# Altium PCB PowerSupply.PcbDoc
Units mm, origin at the board's own origin, x right, y up, seen from the top; angles counter-clockwise.
Board outline 53.68 x 35 mm, 2 copper layers (Top Layer, Bottom Layer), stack 1.581 mm thick; 27 components, 16 nets, 71 pads, 0 vias.
Unrouted connection lines stored in the file: 51.
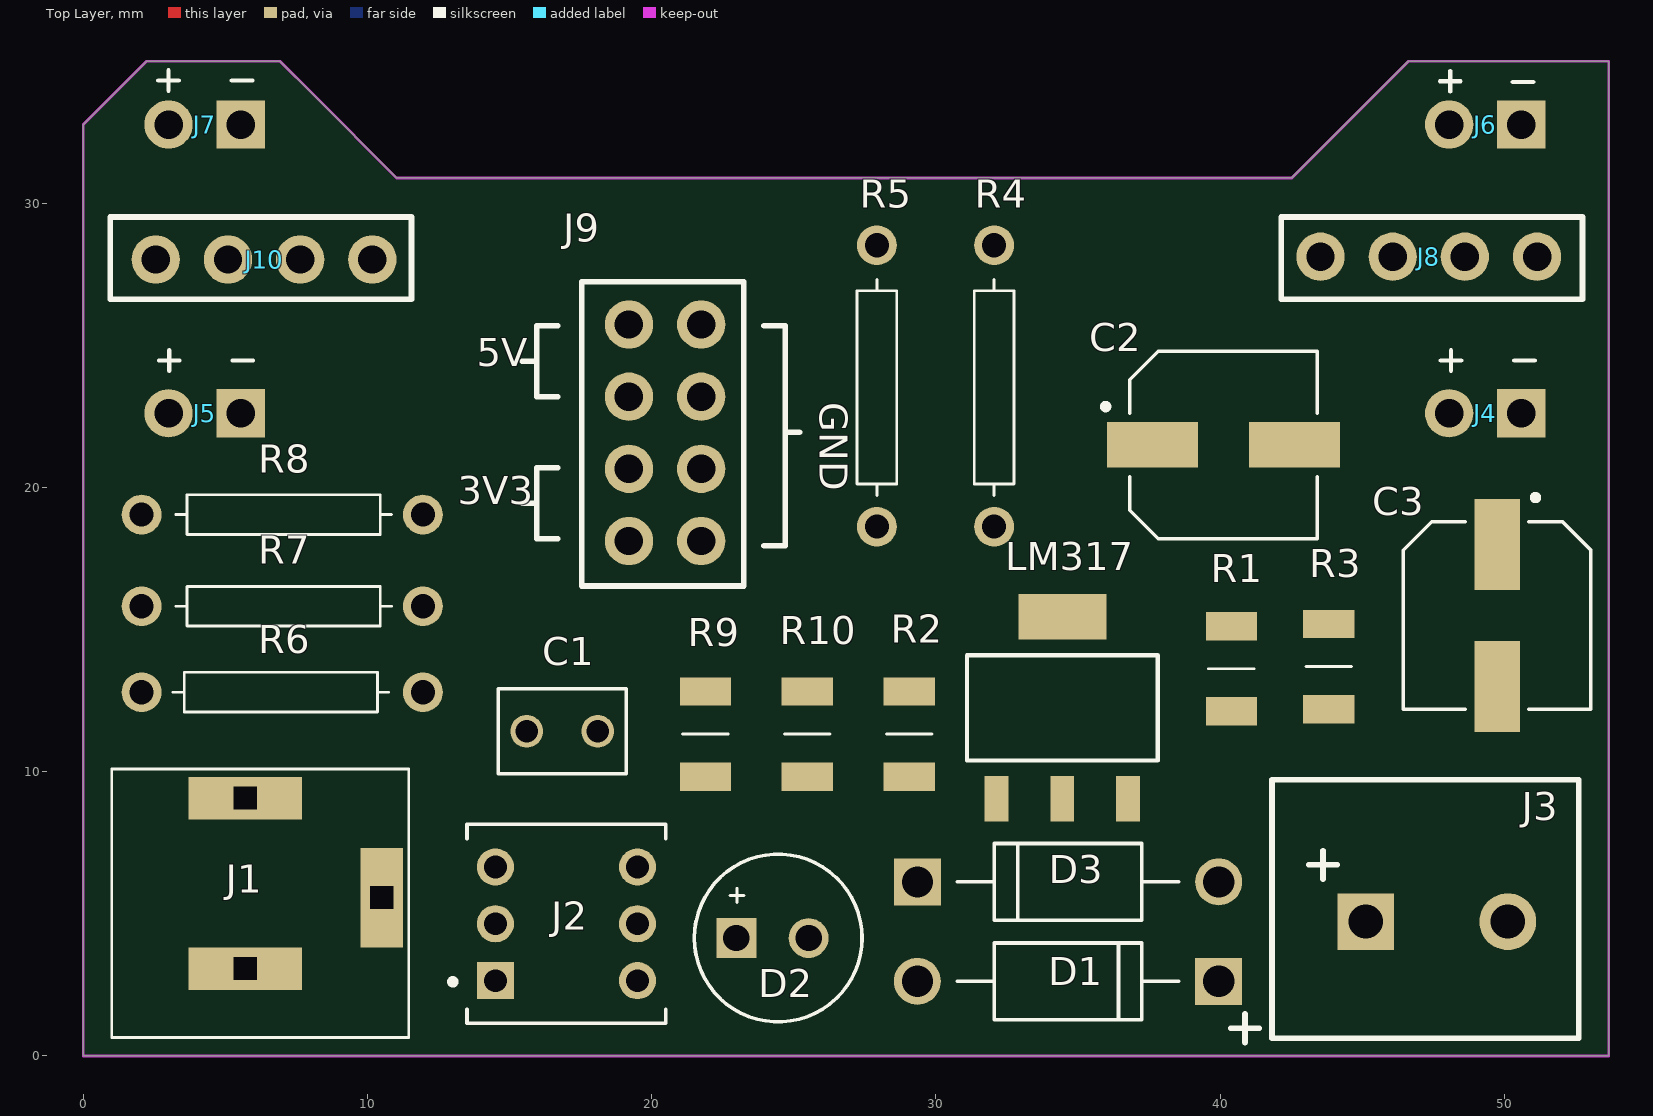
[diagram p0: Top Layer view]
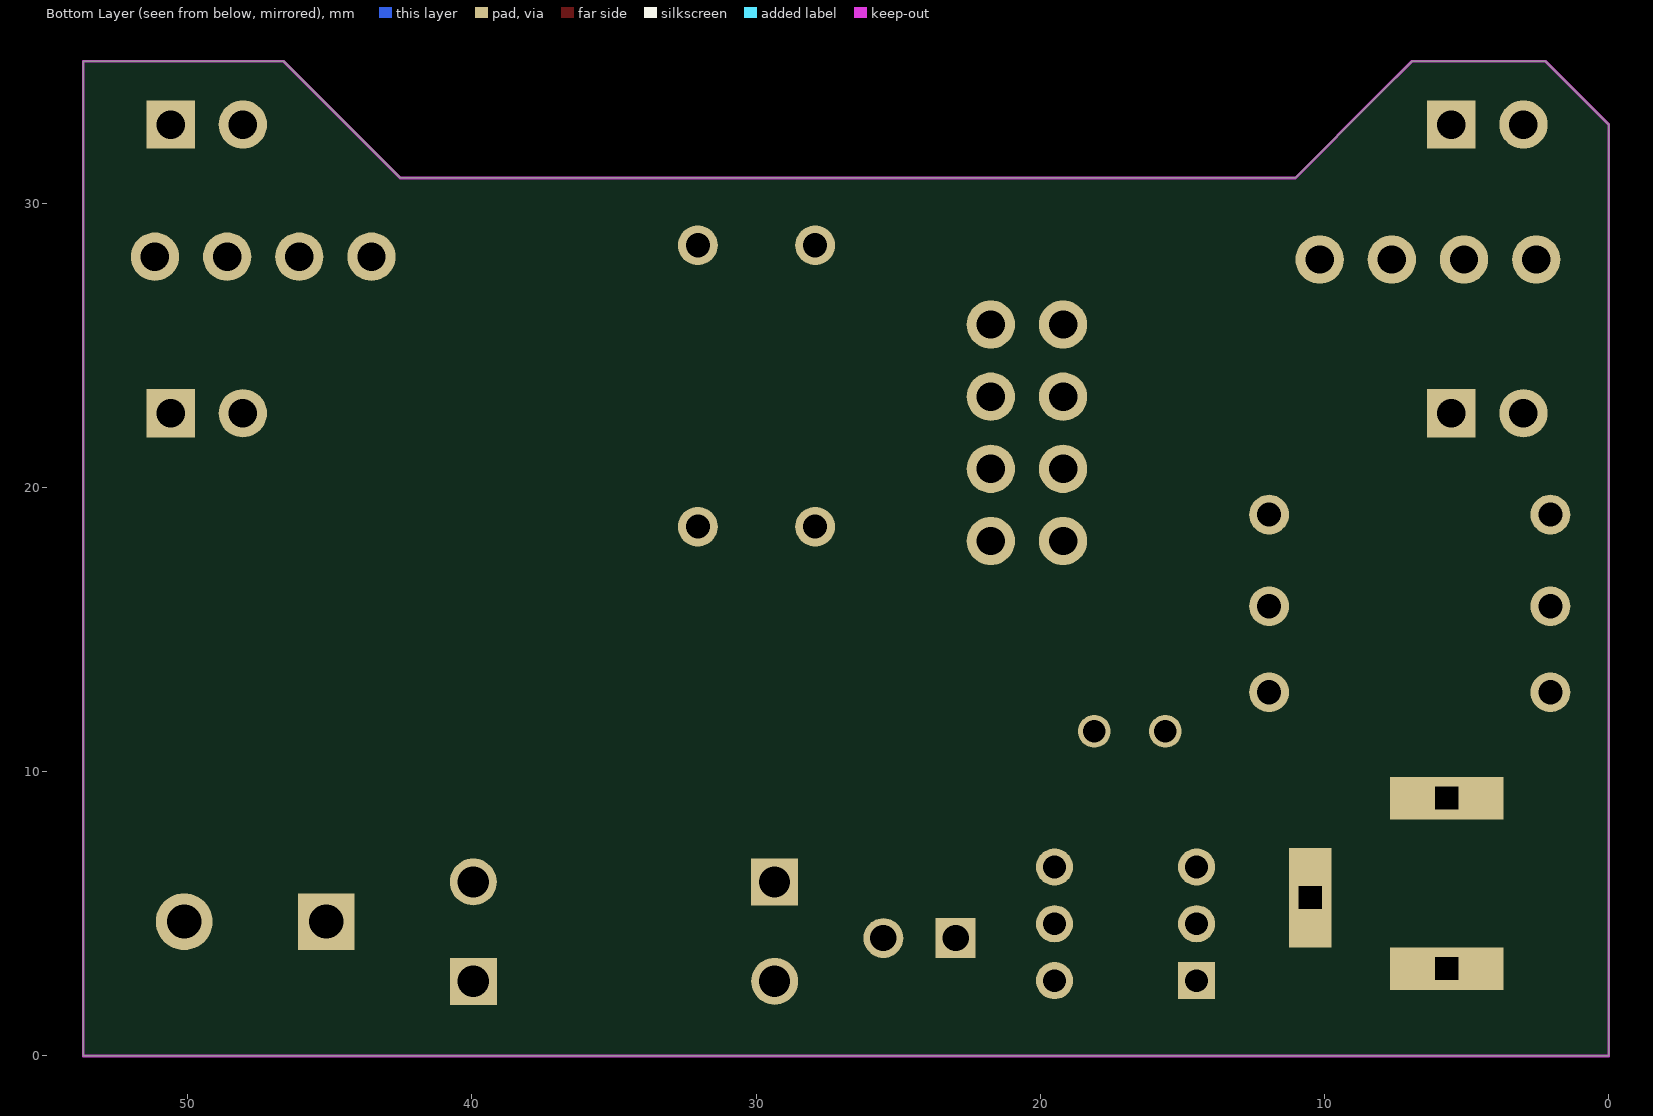
[diagram p1: Bottom Layer view, seen from below]

## Layer stack, top to bottom
Top Solder: solder mask 0.0102, Solder Resist, Dk 3.5
Top Layer: signal copper 0.0356
Dielectric 1: dielectric 1.51, FR-4, Dk 4.8
Bottom Layer: signal copper 0.0356
Bottom Solder: solder mask 0.0102, Solder Resist, Dk 3.5

## Board outline
0,14.775 0,32.775 2.225,35 6.925,35 11.025,30.9 42.525,30.9 46.625,35 53.675,35 53.675,0 37.731,0 0,0

## Design rules (kind name [scope] priority, off if disabled: settings)
AcuteAngle [All] p1: minimum=6.00000000000000E+0001 checktracksonly=TRUE
AssemblyTestPointUsage [(not InNetClass('NOTESTPOINTS'))] p1: allowmultiple=TRUE
AssemblyTestPointUsage AssemblyTestPointUsageN [InNetClass('NOTESTPOINTS')] p2: valid=2 allowmultiple=TRUE
AssemblyTestpoint [All] p1: testpointundercomponent=TRUE minsize=0.8 maxsize=2 preferedsize=1 minholesize=0 maxholesize=0.35 preferedholesize=0 testpointgrid=1.27 usegrid=FALSE gridoriginx=87.5 gridoriginy=62.5 gridtolerance=0 allowsidetop=TRUE minspacing=2.54 // Zollner
BoardOutlineClearance BoardCopperOutlineClearance [(OnLayer('Top Layer') OR OnLayer('Bottom Layer') )] p1: gap=0.5 ignorepadtopadclearanceinfootprint=FALSE except(1: Poly-OutlineEdge Region-OutlineEdge; 1.5: SMDPad-OutlineEdge THPad-OutlineEdge)
Clearance PadToViaClearance [IsVia and not IsComponentVia vs IsPad] p1: gap=0.025 ignorepadtopadclearanceinfootprint=TRUE
Clearance "Clearance (FAB)" [All] p2: gap=0.152 ignorepadtopadclearanceinfootprint=TRUE
ComponentClearance ComponentClearance_NetTie [((ObjectKind = 'Component') And (ComponentType = 'Net Tie')) Or (Footprint = 'StarPoint') Or (Footprint like 'NetTieVia*')] p1: gap=-3.81 collisioncheckmode=3 verticalgap=-3.81 showdistances=FALSE
ComponentClearance [All] p2: gap=0.254 collisioncheckmode=3 verticalgap=0.254 showdistances=FALSE
DiffPairsRouting [All] p1: maxlimit=1.27 minlimit=0.203 mostfreqgap=0.203 toplayer_minwidth=0.152 toplayer_maxwidth=2.54 toplayer_prefwidth=0.254 bottomlayer_minwidth=0.152 bottomlayer_maxwidth=2.54 bottomlayer_prefwidth=0.254 maxuncoupledlength=12.7
FabricationTestPointUsage [All] p1: valid=2 allowmultiple=FALSE
FabricationTestpoint [All] p1: side=3 testpointundercomponent=TRUE minsize=1.016 maxsize=2.54 preferedsize=1.524 minholesize=0 maxholesize=1.016 preferedholesize=0.813 testpointgrid=0.025 allowsidetop=TRUE allowsidebottom=TRUE usegrid=FALSE gridtolerance=0
HoleSize [All] p1: absolutevalues=TRUE maxlimit=6.35 minlimit=0.3 maxpercent=80.000 minpercent=20.000 // Zollner
HoleToHoleClearance HoleToHoleClearance_NetTieVia [InPadClass('NetTieVias') vs InPadClass('NetTieVias')] p1: gap=0 allowstackedmicrovias=TRUE
HoleToHoleClearance [All] p2: gap=0.25 allowstackedmicrovias=TRUE // Zollner
MinimumAnnularRing [All] p1: minimumring=0.15 // PCBWAY
MinimumSolderMaskSliver [All] p1: minsoldermaskwidth=0.2 // Zollner
PlaneClearance PlaneClearance_1 [All] p1: clearance=0.508
PlaneConnect [All] p1: pad.planeconnectstyle=Relief pad.reliefexpansion=0.508 pad.reliefentries=4 pad.reliefconductorwidth=0.254 pad.reliefairgap=0.254 via.planeconnectstyle=Direct via.reliefexpansion=0.508 via.reliefentries=4 via.reliefconductorwidth=0.254 via.reliefairgap=0.254
PolygonConnect [All] p1: thpad.connectstyle=Relief thpad.reliefconductorwidth=0.254 thpad.reliefentries=4 thpad.polygonreliefangle="90 Angle" thpad.airgapwidth=0.254 smdpad.connectstyle=Relief smdpad.reliefconductorwidth=0.254 smdpad.reliefentries=4 smdpad.polygonreliefangle="90 Angle" smdpad.airgapwidth=0.254 via.connectstyle=Direct via.reliefconductorwidth=0.254 via.reliefentries=4 via.polygonreliefangle="90 Angle" via.airgapwidth=0.254
RoutingVias [All] p1: holewidth=0.3 width=0.7 viastyle="Through Hole" minholewidth=0.3 minwidth=0.6 maxholewidth=1.27 maxwidth=1.27
SMDEntry [not IsTestpoint] p1: side=TRUE corner=TRUE anyangle=FALSE
SMDNeckDown [not IsTestpoint] p1: percent=90.000
SMDToCorner [All] p1: distance=10000
SMDToPlane [All] p1: distance=0
ShortCircuit [All vs not IsBoardCutoutRegion] p1: allowed=FALSE
SilkToSolderMaskClearance [IsPad] p1: minsilkscreentomaskgap=0.127 clearancetoexposedcopper=TRUE
SolderMaskExpansion [All] p1: expansion=0.05 istentingtop=FALSE // Zollner
SolderMaskExpansion SolderMaskExpansionToHoles [All] p2: expansion=0.1 istentingtop=FALSE soldermaskfromhole=TRUE // Zollner
UnRoutedNet [All] p1: checkbadconnections=TRUE
Width [All] p1: maxlimit=12.7 minlimit=0.203 preferedwidth=0.3
16 further rules are at their usual default settings.

## Classes and differential pairs
component class PowerSupply: 1.17k C1 C2 C3 D1 D2 D3 J1 J2 J3 J4 J5 J6 J7 J8 J9 J10 LM317 R1 R2 R3 R4 R5 R9 R10

## Components (designator, comment, footprint, x,y, rotation, side; value= is the part's Value field where it differs from the comment)
C1 "0.1uF" "MERCIMEK CAPACITOR" 16.85,11.425 r180 top
C2 "1uF" "SMD CAPACITOR 3X5 MM" 40.125,21.5 r0 top
C3 "10uF" "SMD CAPACITOR 4X5 MM" 49.75,15.5 r270 top
D1 "1N4007 Diode" "1N4007 DIODE" 34.65,2.625 r0 top
D2 "LED THT 5mm" "LED THT" 24.25,4.15 r0 top
D3 "1N4007 Diode" "1N4007 DIODE" 34.65,6.125 r180 top
J1 "Power Jack Female_1" "POWER JACK FEMALE" 12.7,17.075 r90 top
J2 "TOGGLE SWITCH 7mm" "TOGGLE SWITCH 7MM" 17,4.65 r90 top
J3 "KLEMENS 1x2 5mm" "KLEMENS 1X2 5MM" 45.125,4.725 r0 top
J4 "1x2 MALE HEADER" "1X2 MALE HEADER - DUPLICATE" 50.6,22.615 r180 top
J5 "1x2 MALE HEADER" "1X2 MALE HEADER - DUPLICATE" 5.54,22.615 r180 top
J6 "1x2 MALE HEADER" "1X2 MALE HEADER - DUPLICATE" 50.6,32.775 r180 top
J7 "1x2 MALE HEADER" "1X2 MALE HEADER - DUPLICATE" 5.54,32.775 r180 top
J8 "1x4 MALE HEADER" "1X4 MALE HEADER" 51.155,28.125 r180 top
J9 "2x4 MALE HEADER" "2X4 MALE HEADER" 21.74,25.74 r270 top
J10 "1x4 MALE HEADER" "1X4 MALE HEADER" 2.55,28.025 r0 top
LM317 "LM317 SOT-223" "LM317 SOT-223" 34.45,12.25 r90 top (schematic designator U1)
R1 "120" "R1206 RESıSTOR" 40.4,13.55 r90 top
R2 "120" "R1206 RESıSTOR" 29.063,11.25 r90 top
R3 "120" "R1206 RESıSTOR" 43.825,13.775 r270 top
R4 "1.17k" "RESISTOR THT" 32.05,19.625 r90 top
R5 "1.17k" "RESISTOR THT" 27.925,19.625 r90 top
R6 "1.17k" "RESISTOR THT" 3.05,12.8 r0 top
R7 "1.17k" "RESISTOR THT" 10.95,15.825 r180 top
R8 "1.17k" "RESISTOR THT" 10.95,19.05 r180 top
R9 "120" "R1206 Resıstor" 21.888,11.4 r270 top
R10 "120" "R1206 Resıstor" 25.475,11.25 r90 top

## Footprints (in the part's own frame and the unit in brackets; to place one, negate y for a bottom-side part, rotate by r counter-clockwise, add the part's x,y. Pads: shape width x height; smd on the part's side, far side on the other; paste and mask are expansions set on the pad)
"1N4007 DIODE" [mm]
  round 1.65 hole 1.1: 1(-5.3,0)
  rect 1.65x1.65 hole 1.1: 2(5.3,0)
  silkscreen extent -3.9,-1.35 3.9,1.35, body extent -5.67,-1.45 5.27,1.25, height 3.68
"1X2 MALE HEADER - DUPLICATE" [mm]
  rect 1.7x1.7 hole 1 mask+0.05: 1(0,0)
  round 1.7 hole 1 mask+0.05: 2(2.54,0)
  body extent -1.24,-1.24 3.84,1.3, height 1.69
"1X4 MALE HEADER" [mm]
  round 1.7 hole 1 mask+0.05: 1(0,0) 2(2.54,0) 3(5.08,0) 4(7.62,0)
  silkscreen extent -1.6,-1.4 9,1.5, body extent -1.38,-1.2 8.78,1.34, height 9.7
"2X4 MALE HEADER" [mm]
  round 1.7 hole 1 mask+0.05: 1(0,0) 2(0,-2.54) 3(2.54,0) 4(2.54,-2.54) 5(5.08,0) 6(5.08,-2.54) 7(7.62,0) 8(7.62,-2.54)
  silkscreen extent -1.5,-4.2 9.2,1.5, body extent -1.28,-3.78 8.88,1.2, height 8.84
"KLEMENS 1X2 5MM" [mm]
  rect 2x2 hole 1.2: 1(0,0)
  round 2 hole 1.2: 2(5,0)
  silkscreen extent -3.3,-4.1 7.5,5, body extent -3.2,-4 7.4,5, height 13.35
"LED THT" [mm]
  rect 1.4x1.4 hole 0.93: 1(-1.27,0)
  round 1.4 hole 0.93: 2(1.27,0)
  silkscreen extent -2.75,-2.95 3.15,2.95, body extent -2.4,-3.05 3.05,2.85, height 9.24
"LM317 SOT-223" [mil]
  rect 63x33 smd: 1(-126,91) 2(-126,0) 3(-126,-91)
  rect 63x122 smd: 2(126,0)
  silkscreen extent -73,-132 73,132, body extent -130,-130 146,126, height 71
"MERCIMEK CAPACITOR" [mm]
  round 1.15 hole 0.8: 1(-1.25,0) 2(1.25,0)
  silkscreen extent -2.25,-1.5 2.25,1.5, body extent -2.24,-1.5 2.24,1.5, height 5.75
"POWER JACK FEMALE" [mm]
  rect 3.5x1.5 hole 0.8 square mask+0.051: 1(-11.5,2.2)
  rect 1.5x4 hole 0.8 square mask+0.051: 2(-8,7) 3(-14,7)
  silkscreen extent -16.42,1.25 -6.98,11.7, body extent -22.1,2 -7.8,11.4, height 11
"R1206 RESıSTOR" [mm]
  rect 1x1.8 smd mask+0.05: 1(-1.425,0) 2(1.575,0)
  silkscreen extent 0.08,-0.8 0.08,0.81, body extent -1.52,-0.8 1.68,0.81, height 0.55
"R1206 Resıstor" [mm]
  rect 1x1.8 smd mask+0.05: 1(-1.425,0) 2(1.575,0)
  silkscreen extent 0.08,-0.8 0.08,0.81, body extent -1.52,-0.8 1.68,0.81, height 0.55
"RESISTOR THT" [mm]
  round 1.4 hole 0.85 mask+0.051: 1(-1,0) 2(8.9,0)
  silkscreen extent 0.1,-0.7 7.7,0.7, body extent -1.22,-1.1 9.23,0.9, height 2.5
"SMD CAPACITOR 3X5 MM" [mm]
  rect 3.2x1.6 smd: 1(-2.5,0) 2(2.5,0)
  silkscreen extent -4.25,-3.3 3.3,3.3, body extent 0,0 0,0
"SMD CAPACITOR 4X5 MM" [mm]
  rect 3.2x1.6 smd: 1(-2.5,0) 2(2.5,0)
  silkscreen extent -4.25,-3.3 3.3,3.3, body extent 0,0 0,0
"TOGGLE SWITCH 7MM" [mm]
  rect 1.308x1.308 hole 0.8: 1(-2,2.5)
  round 1.308 hole 0.8: 2(0,2.5) 3(2,2.5) 4(-2,-2.5) 5(0,-2.5) 6(2,-2.5)
  silkscreen extent -3.5,-3.5 3.5,4.1, body extent -3.52,-3.45 3.52,3.45, height 13.54

## Part data
C1: library part "MERCIMEK CAPACITOR"
C2: library part "SMD CAPACITOR 3x5mm"
C3: library part "SMD CAPACITOR 4x5mm"
R1 R2 R3 R9 R10: library part R1206
R4 R5 R6 R7 R8: library part "RESISTOR THT"

## Nets (pads, with @x,y where several pads share a name; then routed paths per layer and width w, separated by ;. In a path a pad name is that pad's centre, name@x,y a point inside that pad or via, vN(x,y) a via of type N, cw(c..) or ccw(c..) an arc to the next point about the centre after c; other vN are vias at no path point)
3V3: J8.1 J9.6 J9.8 J10.1 R6.2 R7.1
5V: C2.1 D1.1 D3.2 J8.4 J9.2 J9.4 J10.4 LM317.2 R1.1 R6.1
GND: C1.2 C2.2 C3.2 J1.1 J1.3 J3.2 J4.1 J5.1 J6.1 J7.1 J9.1 J9.3 J9.5 J9.7 R5.2 R8.2
NetC3_1: C3.1 D3.1 R3.2
NetD1_2: D1.2 D2.2 LM317.3
NetD2_1: D2.1 R10.1
NetJ2_4: J2.4 R9.2
NetR1_2: R1.2 R3.1
NetR2_1: LM317.1 R2.1
NetR2_2: R2.2 R4.1
NetR4_2: R4.2 R5.1
NetR7_2: R7.2 R8.1
NetR9_1: R9.1 R10.2
VCC_1: J4.2 J6.2 J8.2 J8.3
VCC_2: J5.2 J7.2 J10.2 J10.3
VIN: C1.1 J1.2 J2.5 J3.1
pads on no net: J2.1 J2.2 J2.3 J2.6

## Keep-outs
Keep-Out Layer:
  lines w0.1: 2.225,35 6.925,35 8.08,33.845 11.025,30.9 42.525,30.9 46.625,35 53.675,35 53.675,14.775 53.675,0 37.731,0 0,0 0,14.775 0,32.775 2.225,35 ; 2.225,35 2.225,35

## Silkscreen, mask and mechanical layers (free items; w line width, h text height)
Top Overlay:
  lines w0.15: 2.637,34.325 3.362,34.325 ; 2.662,24.475 3.387,24.475 ; 3,33.963 3,34.687 ; 3.025,24.112 3.025,24.837 ; 5.225,34.325 5.95,34.325 ; 5.25,24.475 5.975,24.475 ; 47.737,34.3 48.462,34.3 ; 47.762,24.475 48.487,24.475 ; 48.1,33.937 48.1,34.662 ; 48.125,24.112 48.125,24.837 ; 50.3,34.275 51.025,34.275 ; 50.35,24.475 51.075,24.475
  lines w0.2: 15.45,19.45 15.95,19.45 ; 15.45,24.45 15.95,24.45 ; 16.7,18.2 15.95,18.2 15.95,20.7 ; 16.7,20.7 15.95,20.7 ; 16.7,23.2 15.95,23.2 15.95,25.7 ; 16.7,25.7 15.95,25.7 ; 23.95,17.95 24.7,17.95 24.7,25.7 23.95,25.7 ; 24.7,21.95 25.2,21.95 ; 40.375,0.975 41.375,0.975 ; 40.875,0.475 40.875,1.475 ; 15.95,20.7 15.95,20.7 ; 15.95,25.7 15.95,25.7
  text "5V" at 13.85,23.938 h1.7
  text "GND" at 25.588,23 h1.7 r270
  text "3V3" at 13.175,19.088 h1.7